# EAGLE board EEPROM DIP Breakout WP Pin (EAGLE 8.4.0)
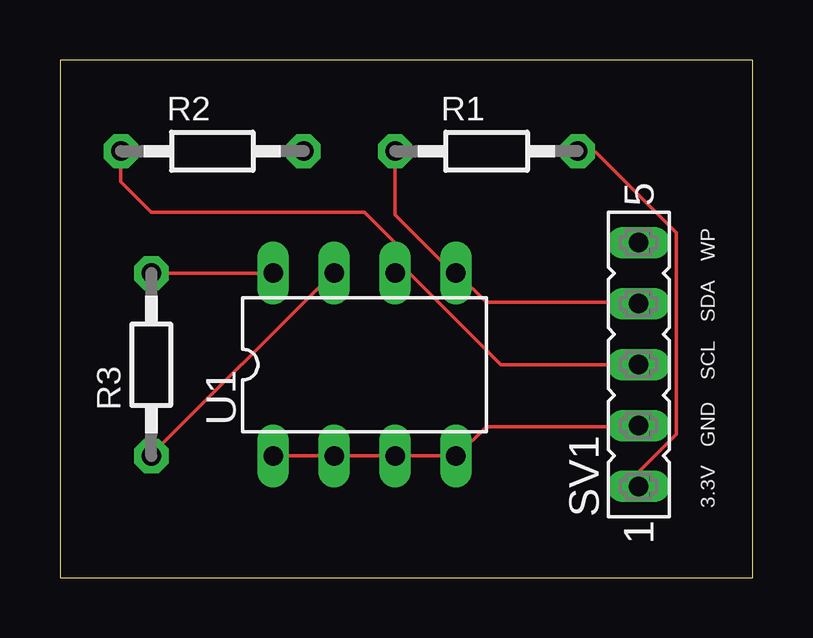
[diagram p0: board, top side]
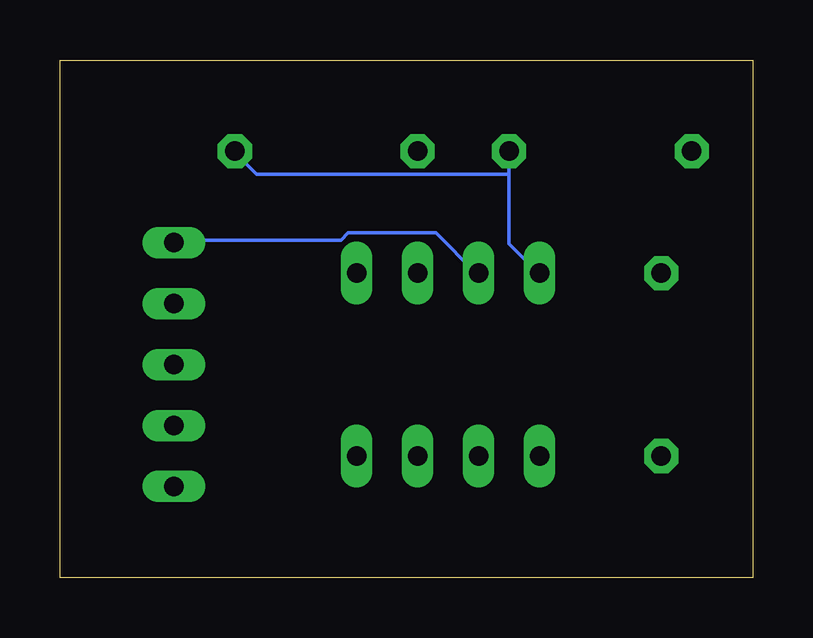
[diagram p1: board, bottom side, seen from below]

Size 28.88 x 21.58 mm. Coordinates in mm from the lower left corner, seen from the top.
Outline: 0,0 28.88,0 28.88,21.58 0,21.58 0,0
Copper layers (1*16): Top 0.035mm / dielectric 1.5mm / Bottom 0.035mm
Design rules "default": minimum track width 6mil, minimum drill 0.35mm, track to track 6mil, track to pad 6mil, pad to pad 6mil, via to via 6mil, smd to smd 6mil, copper to edge 40mil, drill to drill 6mil, minimum pad ring 10mil, minimum via ring 8mil, stop-mask expansion 4mil, vias tented up to drill 0mil, thermal gap 10mil

## Footprints (pad centres in the part's own frame; a part is rotated, then mirrored left to right if it is on the bottom)
0204/7 = drill 0.813 pad 1.422 octagon: 1 -3.81,0; 2 3.81,0
FE05-1 = drill 0.813 long: 1 -5.08,0; 2 -2.54,0; 3 0,0; 4 2.54,0; 5 5.08,0
DIL08 = drill 0.813 long: 1 -3.81,-3.81; 2 -1.27,-3.81; 3 1.27,-3.81; 4 3.81,-3.81; 5 3.81,3.81; 6 1.27,3.81; 7 -1.27,3.81; 8 -3.81,3.81

## Placement (x,y rotation side)
R1  3.9K  [0204/7]  17.78,17.78 0 top
R2  3.9K  [0204/7]  6.35,17.78 0 top
R3  3.9K  [0204/7]  3.81,8.89 90 top
SV1  [FE05-1]  24.13,8.89 90 top
U1  CAT24C32  [DIL08]  12.7,8.89 0 top

## Library data of the parts
R1-R3 = rc-master
SV1 = con-lsta; OC_FARNELL: unknown; OC_NEWARK: unknown
U1 = atmel; MPN: AT24C1024BW-SH-B; OC_FARNELL: 1362646; OC_NEWARK: 03P2044

## Nets
3.3V: R1.2 R2.2 R3.2 SV1.1 U1.8
GND: SV1.2 U1.1 U1.2 U1.3 U1.4
N$1: R1.1 SV1.4 U1.5
N$2: R2.1 SV1.3 U1.6
N$16: R3.1 SV1.5 U1.7

## Tracks (layer width: path | path; a pad name or v marks a point on that pad's centre or on a via)
3.3V
  Top 0.152: R3.2 U1.8 | SV1.1 24.18,3.86 24.18,4.47 25.7,5.99 25.7,14.38 22.35,17.73 21.59,17.73 R1.2
  Bottom 0.152: 10.16,16.81 10.16,13.92 8.94,12.7 U1.8 | 10.16,16.81 R2.2 | 10.16,16.81 20.68,16.81 21.59,17.73 R1.2
GND
  Top 0.152: U1.1 U1.2 U1.3 U1.4 16.56,5.08 17.78,6.3 24.03,6.3 SV1.2
N$1
  Top 0.152: SV1.4 24.03,11.48 17.78,11.48 16.56,12.7 U1.5 16.41,12.7 13.97,15.14 R1.1
N$2
  Top 0.152: U1.6 14.58,12.7 18.39,8.89 SV1.3 | U1.6 13.82,12.7 | 2.54,17.73 R2.1 2.54,16.51 3.81,15.24 12.7,15.24 13.97,13.97 U1.6
N$16
  Top 0.152: U1.7 11.38,12.7 3.76,5.08 R3.1
  Bottom 0.152: SV1.5 24.03,14.07 17.17,14.07 16.87,14.38 13.21,14.38 11.53,12.7 U1.7

## Text on the board
tPlace: WP | SDA | SCL | GND | 3.3V